# EAGLE board TEST_BATT_BOT (EAGLE 9.6.2)
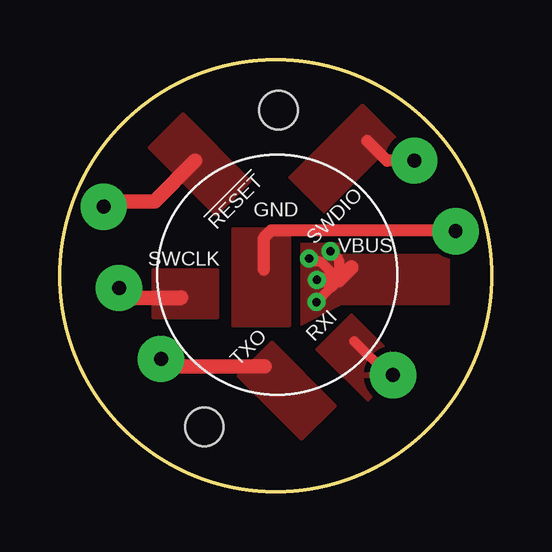
[diagram p0: board, top side]
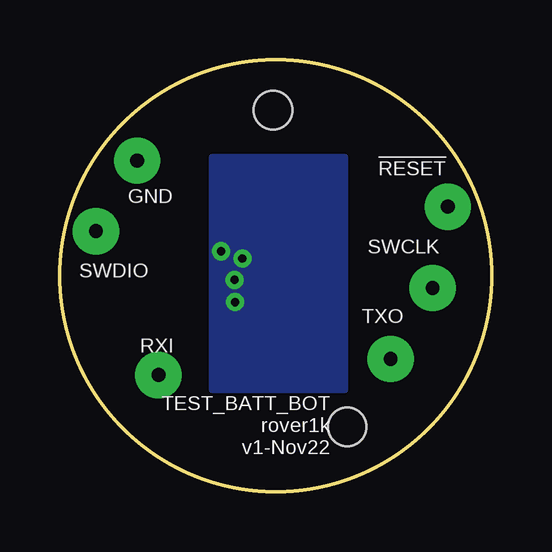
[diagram p1: board, bottom side, seen from below]

Size 18 x 18 mm. Coordinates in mm from the lower left corner, seen from the top.
Outline: circle at 9,9 radius 9
Copper layers (1*16): Top 0.035mm / dielectric 1.5mm / Bottom 0.035mm
Design rules "default *": minimum track width 0.00038125mm, minimum drill 0.35mm, track to track 8mil, track to pad 8mil, pad to pad 8mil, via to via 8mil, smd to smd 5mil, copper to edge 8mil, drill to drill 8mil, minimum pad ring 10mil, minimum via ring 8mil, stop-mask expansion 2mil, vias tented up to drill 50mil, thermal gap 10mil
Holes 1.6 mm at 6.02,2.7 9.11,15.91

## Footprints (pad centres in the part's own frame; a part is rotated, then mirrored left to right if it is on the bottom)
1X01_POGOPIN_HOLE_0.061_DIA = drill 0.58 pad 1.93: 2 0,0

## Placement (x,y rotation side)
!RESET  [1X01_POGOPIN_HOLE_0.061_DIA]  1.82,11.88 0 top
GND  [1X01_POGOPIN_HOLE_0.061_DIA]  14.78,13.8 0 top
RXI  [1X01_POGOPIN_HOLE_0.061_DIA]  13.89,4.86 0 top
SWCLK  [1X01_POGOPIN_HOLE_0.061_DIA]  2.46,8.49 0 top
SWDIO  [1X01_POGOPIN_HOLE_0.061_DIA]  16.5,10.86 0 top
TXO  [1X01_POGOPIN_HOLE_0.061_DIA]  4.21,5.53 0 top

## Library data of the parts
!RESET GND RXI SWCLK SWDIO TXO = SparkFun-Connectors

## Nets
!RESET: !RESET.2
GND: SWDIO.2
RXI: RXI.2
SWCLK: SWCLK.2
SWDIO: GND.2
TXO: TXO.2

## Tracks (layer width: path | path; a pad name or v marks a point on that pad's centre or on a via)
!RESET
  Top 0.61: !RESET.2 2.04,12.1 3.94,12.1 5.64,13.8
  pour Top: 6.52,11.54 7.93,12.95 5.13,15.75 3.71,14.34
GND
  Top 0.508: SWDIO.2 16.47,10.89 8.81,10.89 8.49,10.57 8.49,9.24
  pour Top: 7.19,10.97 9.54,10.97 9.6,10.91 9.6,6.92 9.58,6.9 7.19,6.9
RXI
  Top 0.406: RXI.2 13.69,4.86 12.27,6.28
  pour Top (isolate 0.254): 12.16,7.41 10.68,5.94 12.84,3.77 14.32,5.26
SWCLK
  Top 0.61: SWCLK.2 2.88,8.07 5.03,8.07 5.05,8.09
  pour Top: 3.89,9.23 3.89,7.25 6.57,7.25 6.57,9.23
SWDIO
  Top 0.508: GND.2 13.64,13.8 12.81,14.63
  pour Top: 12.36,15.91 9.55,13.1 11.02,11.63 14.03,14.65 14.03,14.75 12.67,16.11 12.57,16.11 12.37,15.91
TXO
  Top 0.61: TXO.2 4.53,5.21 8.53,5.21
  pour Top: 10.08,2.17 11.49,3.58 8.83,6.24 7.42,4.82
VBUS  (via drill 0.35)
  Top 0.406: v11.28,10.02 11.63,9.67 11.63,8.83 | 10.8,8.82 10.86,8.82 10.87,8.83 11.63,8.83 | v10.7,7.9 11.84,9.04 | v10.39,9.72 10.52,9.59 10.87,9.59 11.63,8.83
  Top 0.61: v10.72,8.83 11.63,8.83 11.84,9.04 12.15,9.35
  pour Bottom: 6.13,13.93 11.64,13.93 11.64,4.27 6.13,4.27
  pour Top: 11.32,9.85 11.32,7.85 16.2,7.85 16.2,9.85
  pour Top (isolate 0.254): 10.05,10.55 10.05,6.95 11.66,7.78 11.66,10.55

## Text on the board
tNames: SWDIO | !RESET | GND | SWCLK | VBUS | RXI | TXO
bNames: TEST_BATT_BOT / rover1k / v1-Nov22